# Altium PCB Motor Board.PcbDoc
Units mil, origin at the board's own origin, x right, y up, seen from the top; angles counter-clockwise.
Board outline 2020.01 x 1519 mil, 4 copper layers (Top Layer, GND, V_BATT, Bottom Layer); 38 components, 25 nets, 114 pads, 44 vias.
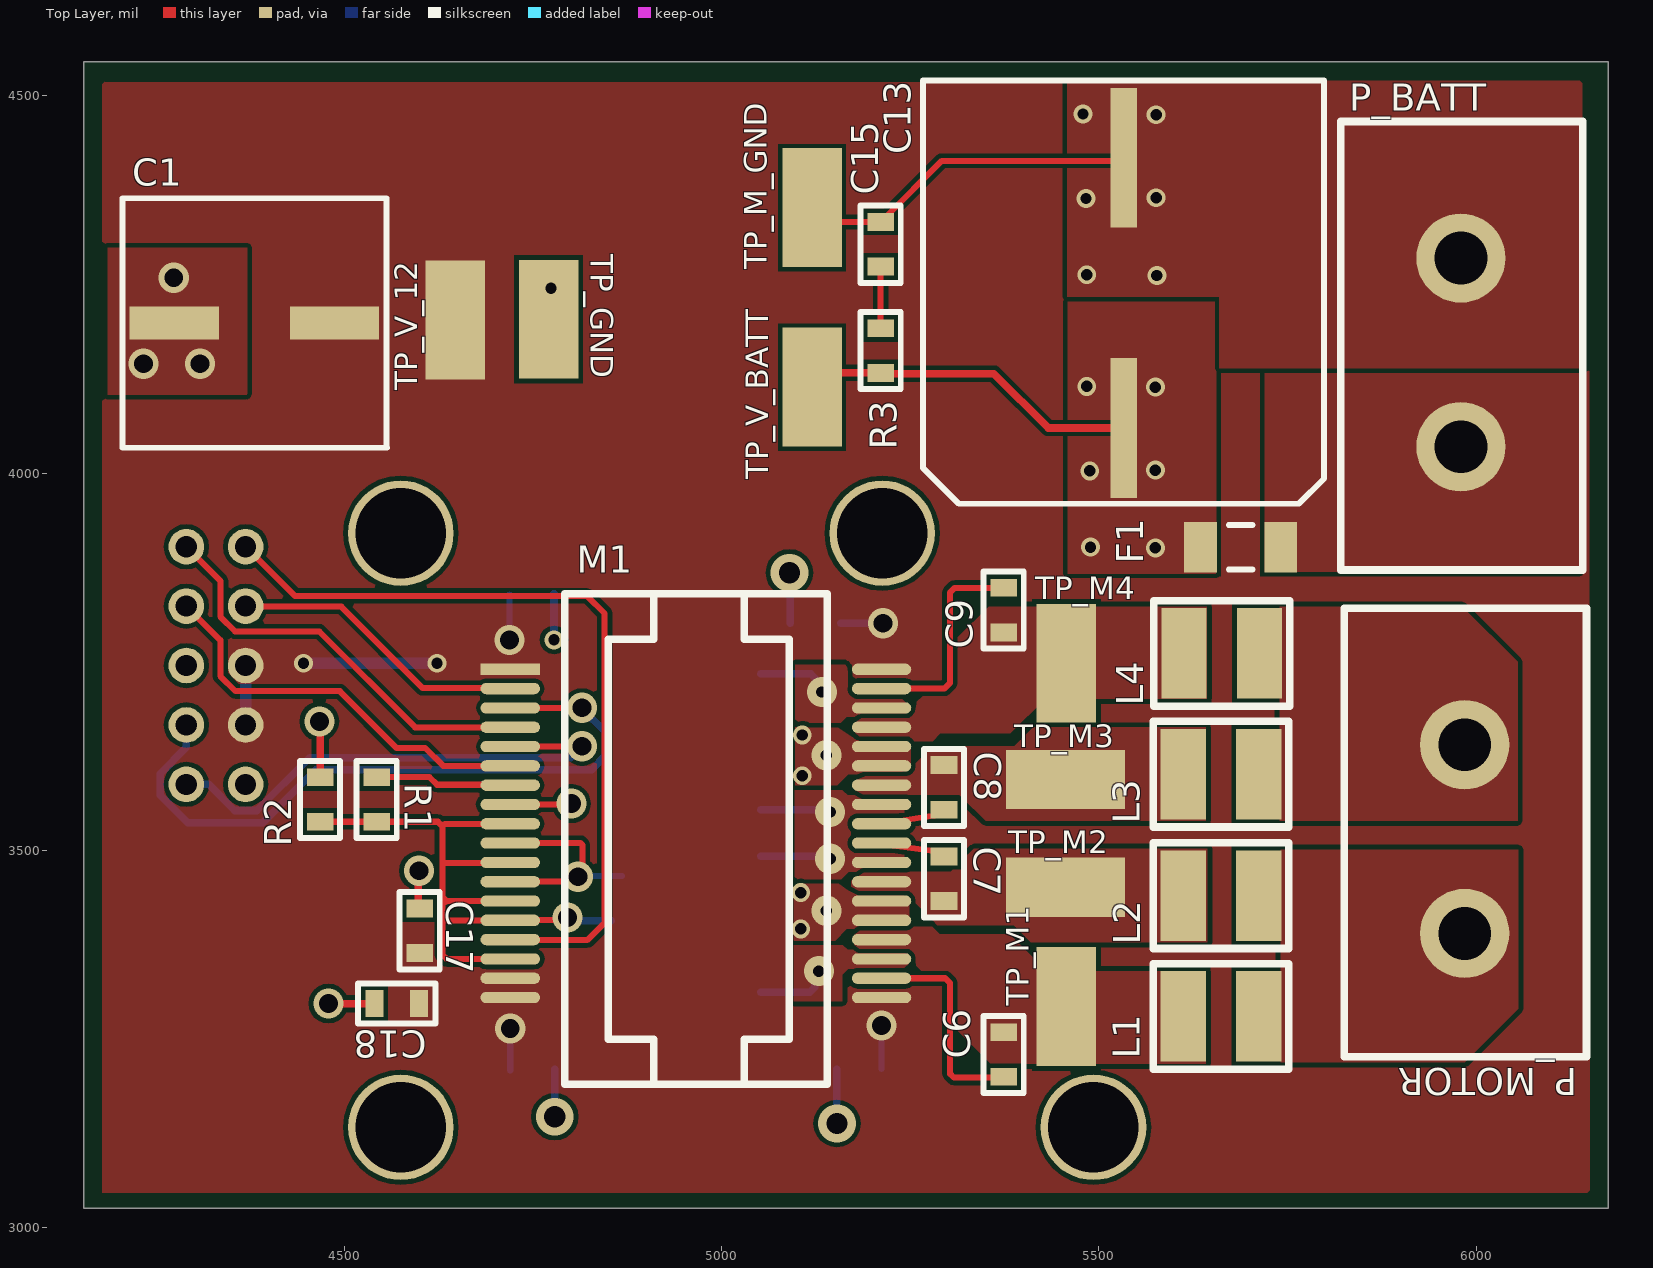
[diagram p0: Top Layer view]
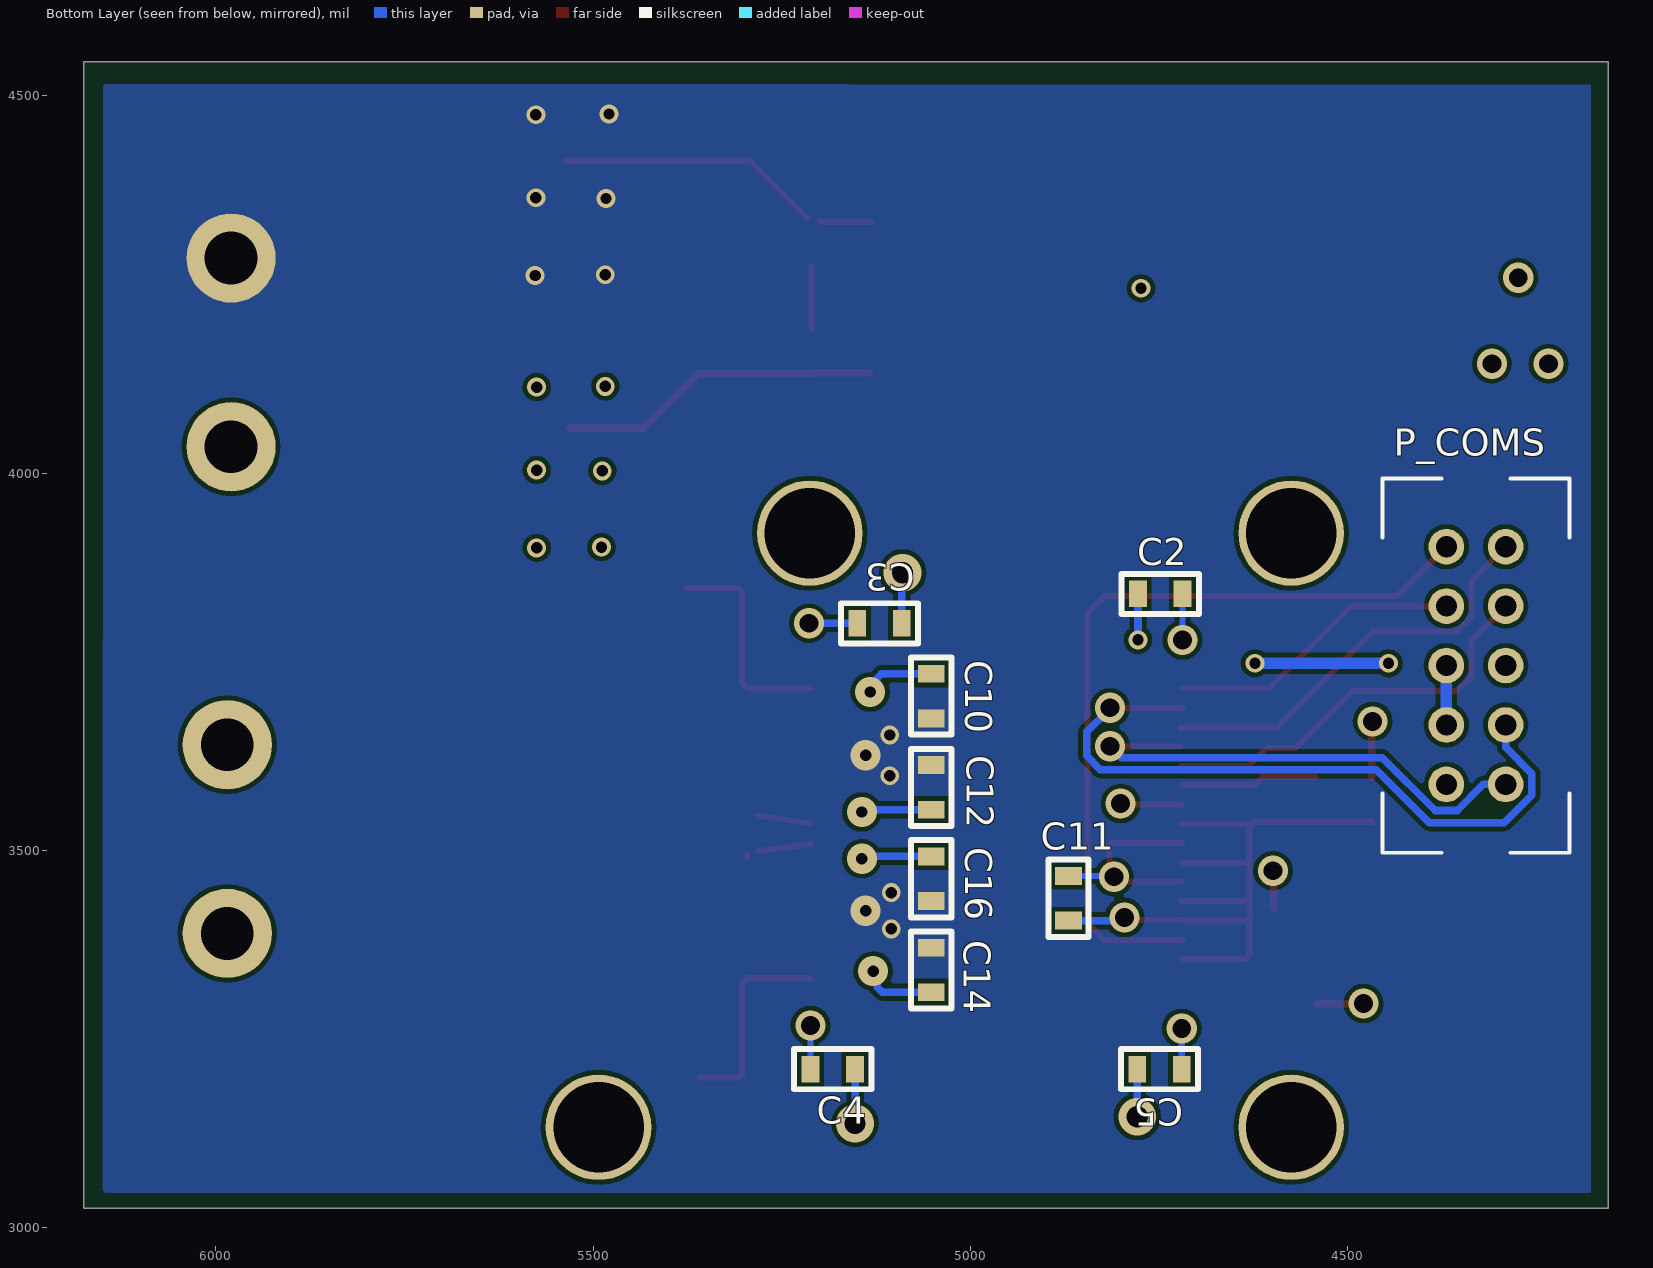
[diagram p1: Bottom Layer view, seen from below]
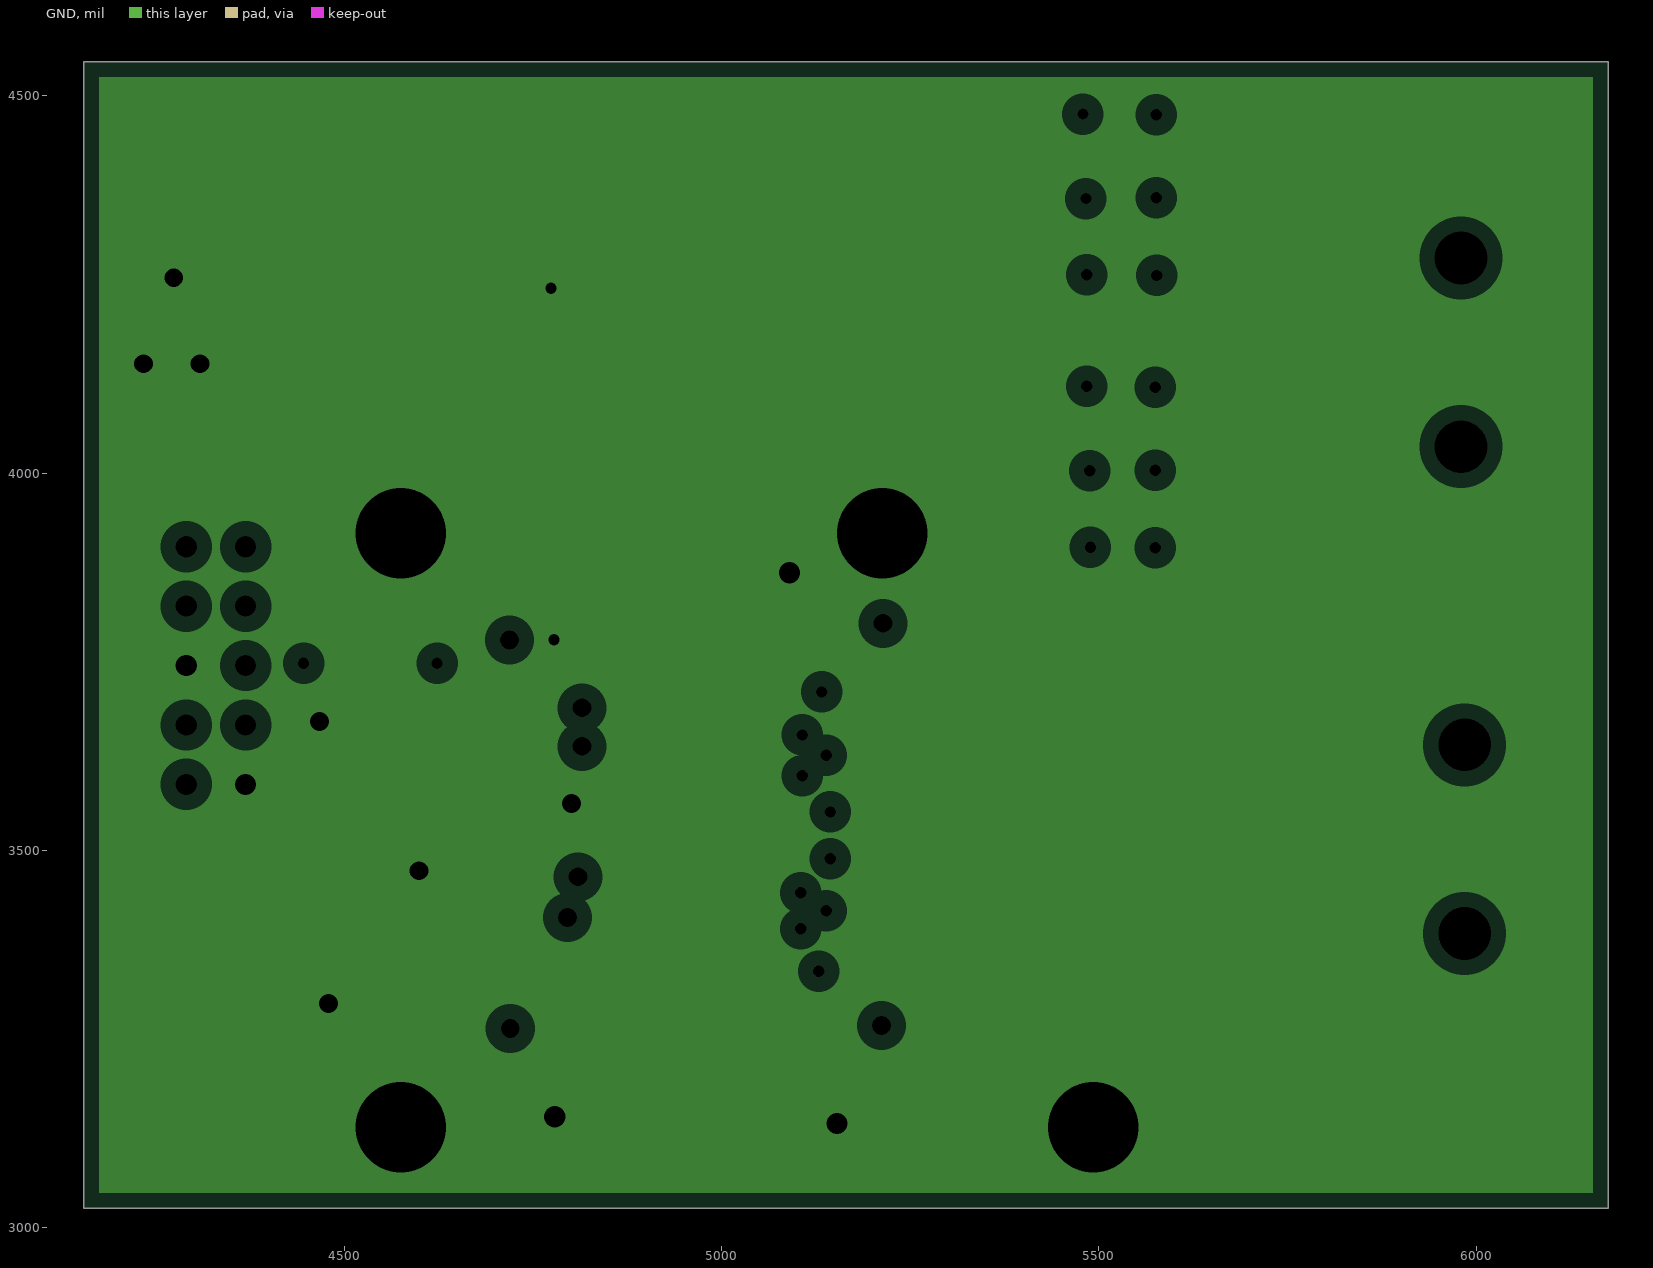
[diagram p2: GND, clearances drawn from the general rule]
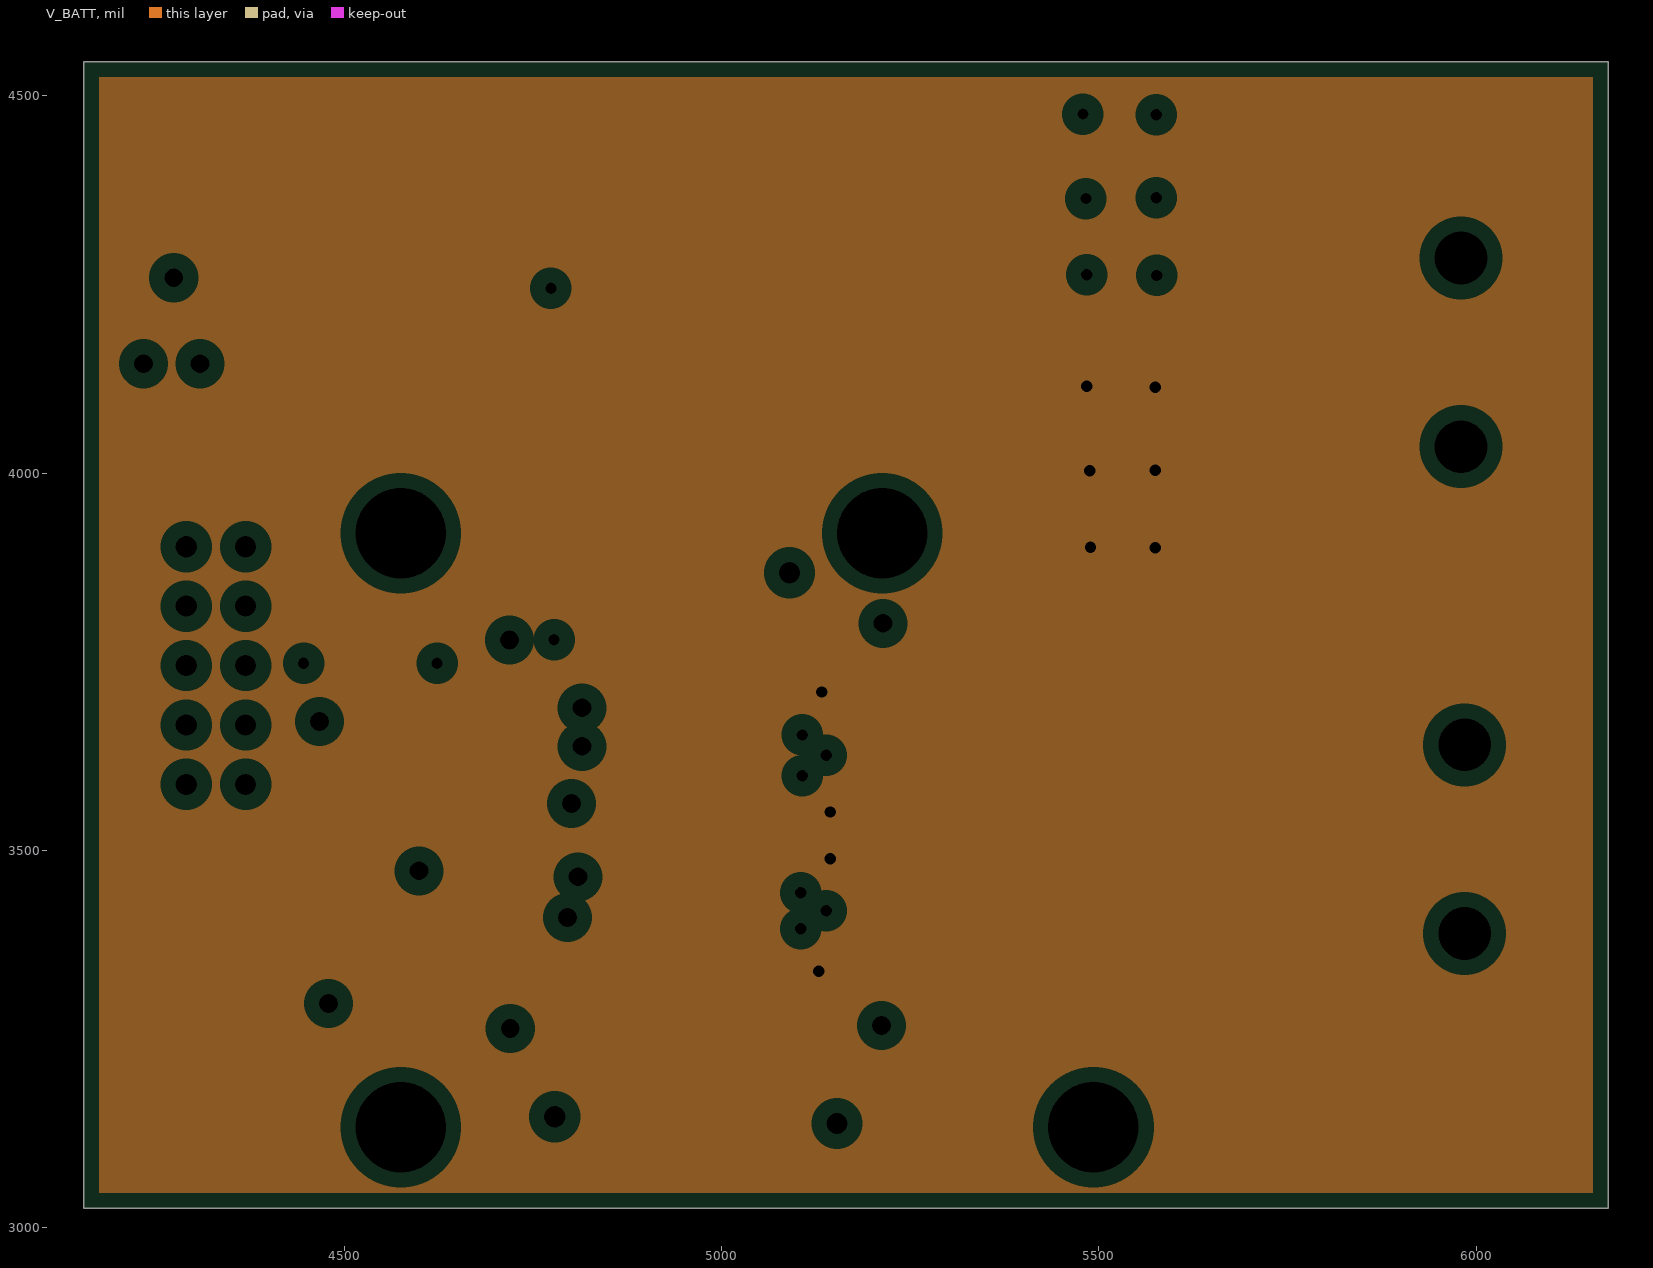
[diagram p3: V_BATT, clearances drawn from the general rule]

## Layer stack, top to bottom
Top Layer: signal copper 1.4
Dielectric: core 12.6, FR-4, Dk 4.8
GND: plane copper 1.4, net GND
Dielectric: prepreg 12.6, FR-4, Dk 4.8
V_BATT: plane copper 1.4, net V_BATT
Dielectric: core 12.6, FR-4, Dk 4.8
Bottom Layer: signal copper 1.4

## Board outline
4154.99,3026 6175,3026 6175,4545 4154.99,4545

## Design rules (kind name [scope] priority, off if disabled: settings)
Clearance Clearance_Polygon [InPolygon vs IsVia Or IsPad] p1 off: gap=23.62
Clearance Clearance_Inner [(OnLayer('Mid-Layer 1') OR OnLayer('Mid-Layer 2'))] p2: gap=10
Clearance [All] p3: gap=6
HoleSize [All] p1: absolutevalues=TRUE maxlimit=200 minlimit=15 maxpercent=80.000 minpercent=20.000
MinimumAnnularRing MinimumAnnularRing_Via [(IsVia)] p1: minimumring=5
MinimumAnnularRing MinimumAnnularRing_Hole [(InComponent('*'))] p2: minimumring=7
MinimumSolderMaskSliver [All] p1: minsoldermaskwidth=3.94
NetAntennae [All] p1 off: netantennaetolerance=0
PasteMaskExpansion [All] p1 off: expansion=0
PlaneClearance [All] p1: clearance=20
PlaneConnect [All] p1: planeconnectstyle=Relief reliefexpansion=20 reliefentries=4 reliefconductorwidth=10 reliefairgap=10
PolygonConnect [All] p1: connectstyle=Direct reliefconductorwidth=10 reliefentries=4 polygonreliefangle="90 Angle"
RoutingVias [All] p1: holewidth=15 width=25 viastyle="Through Hole" minholewidth=15 minwidth=25 maxholewidth=50 maxwidth=80
SMDNeckDown [All] p1: percent=60.000
SMDToCorner [All] p1: distance=393701
SilkToSilkClearance [All] p1 off: silktosilkclearance=5
SilkscreenOverComponentPads [All] p1 off: minsilkscreentomaskgap=5
SolderMaskExpansion [All] p1: expansion=2.5
Width [All] p1: maxlimit=200 minlimit=6 preferedwidth=8
20 further rules are at their usual default settings.

## Components (designator, comment, footprint, x,y, rotation, side; value= is the part's Value field where it differs from the comment)
C1 "330uF" "330uF Capacitor" 4381,4199 r0 top
C2 "1uF" 0603 4778,3840 r180 bottom
C3 "1uF" 0603 5091,3801 r0 bottom
C4 "1uF" 0603 5153,3210 r0 bottom
C5 "1uF" 0603 4779,3210 r180 bottom
C6 "100nF" 0603 5374,3259 r270 top
C7 "100nF" 0603 5295,3433 r90 top
C8 "100nF" 0603 5295,3613 r270 top
C9 "100nF" 0603 5374,3789 r90 top
C10 "100nF" 0603 5052,3675 r90 bottom
C11 "100nF" 0603 4870,3407 r90 bottom
C12 "100nF" 0603 5052,3613 r270 bottom
C13 "1000 uF" "Capacitor 1000uF" 5533,4239 r270 top
C14 "100nF" 0603 5052,3371 r270 bottom
C15 "10nF" 0603 5211,4333 r270 top
C16 "100nF" 0603 5052,3433 r90 bottom
C17 "1uF" 0603 4600,3364 r90 top
C18 "1uF" 0603 4599,3297 r180 top
F1 "12A fuse" RESC3216L 5688,3902 r0 top
L1 "FERRITE BEAD 10A" "10A Ferrite Bead - duplicate" 5662,3280 r0 top
L2 "FERRITE BEAD 10A" "10A Ferrite Bead - duplicate" 5662,3440 r0 top
L3 "FERRITE BEAD 10A" "10A Ferrite Bead - duplicate" 5662,3601 r0 top
L4 "FERRITE BEAD 10A" "10A Ferrite Bead - duplicate" 5663,3761 r0 top
M1 "DRV8432" DRV8432 4720,3740 r0 top
P_BATT "To Battery" 0010844020 5980,4035 r90 top (schematic designator P3)
P_COMS "79107-7004" 79107-7004 4330,3745 r90 bottom (schematic designator P1)
P_MOTOR "To Motor" 0010844020 5985,3390 r90 top (schematic designator P2)
R1 "22K" 0603 4543,3538 r90 top
R2 "1R0" 0603 4468,3538 r90 top
R3 "33R" 0603 5211,4192 r270 top
TP_GND "TP" TEST_POINT_4X2MM 4771,4204 r90 top
TP_M1 "TP" TEST_POINT_4X2MM 5457,3293 r270 top
TP_M2 "TP" TEST_POINT_4X2MM 5456,3451 r180 top
TP_M3 "TP" TEST_POINT_4X2MM 5456,3594 r180 top
TP_M4 "TP" TEST_POINT_4X2MM 5457,3748 r90 top
TP_M_GND "TP" TEST_POINT_4X2MM 5120,4352 r90 top
TP_V_12 "TP" TEST_POINT_4X2MM 4647,4203 r90 top
TP_V_BATT "TP" TEST_POINT_4X2MM 5120,4114 r90 top

## Footprints (in the part's own frame and the unit in brackets; to place one, negate y for a bottom-side part, rotate by r counter-clockwise, add the part's x,y. Pads: shape width x height; smd on the part's side, far side on the other; paste and mask are expansions set on the pad)
"10A Ferrite Bead - duplicate" [mil]
  rect 60x120 smd: 1(-50,0) 2(50,0)
  silkscreen extent -90,-70 90,70
"330uF Capacitor" [mm]
  rect 3x1.1 smd: 1(-2.7,0) 2(2.7,0)
  silkscreen extent -4.44,-4.2 4.45,4.2
0603 [mm] "Non polarized 0603 footprint"
  rect 0.6x0.9 smd: 1(0,0) 2(1.5,0)
  silkscreen extent -0.55,-0.67 2.05,0.67
79107-7004 [mm]
  round 1.2 hole 0.71: 1(4,-1) 2(2,-1) 3(0,-1) 4(-2,-1) 5(-4,-1) 6(-4,1) 7(-2,1) 8(0,1) 9(2,1) 10(4,1)
  silkscreen extent -6.3,-3.15 6.3,3.15, body extent -6.25,-3.1 6.2,3.1, height 6.4
0010844020 [mm]
  round 3 hole 1.778: 1(0,0) 2(6.35,0)
  silkscreen extent -4.15,-4.1 10.95,4.05
"Capacitor 1000uF" [mm]
  rect 4.7x0.9 smd: 1(-4.55,0) 2(4.55,0)
  silkscreen extent -7.15,-6.75 7.1,6.75
DRV8432 [mm]
  rect 2x0.38 smd: 1(0,0)
  oval 2x0.38 smd: 2(0,-0.65) 3(0,-1.3) 4(0,-1.95) 5(0,-2.6) 6(0,-3.25) 7(0,-3.9) 8(0,-4.55) 9(0,-5.2) 10(0,-5.85) 11(0,-6.5) 12(0,-7.15) 13(0,-7.8) 14(0,-8.45) 15(0,-9.1) 16(0,-9.75) 17(0,-10.4) 18(0,-11.05) 19(12.5,-11.05) 20(12.5,-10.4) 21(12.5,-9.75) 22(12.5,-9.1) 23(12.5,-8.45) 24(12.5,-7.8) 25(12.5,-7.15) 26(12.5,-6.5) 27(12.5,-5.85) 28(12.5,-5.2) 29(12.5,-4.55) 30(12.5,-3.9) 31(12.5,-3.25) 32(12.5,-2.6) 33(12.5,-1.95) 34(12.5,-1.3) 35(12.5,-0.65) 36(12.5,0)
  silkscreen extent 1.84,-13.97 10.67,2.54
RESC3216L [mm] "Chip Resistor, Body 3.1x1.6mm, IPC High Density"
  rect 1.1x1.7 smd: 1(-1.35,0) 2(1.35,0)
  silkscreen extent -0.4,-0.75 0.4,0.75, body extent -1.68,-0.87 1.68,0.87, height 2.54
TEST_POINT_4X2MM [mm] "Test Point Pad"
  rect 4x2 smd: 1(0,0)

## Part data
C1: library part AVE337M16F24T-F
C2 C3 C4 C5 C17 C18: library part CP_1uF_50V_0603, "CAP CER 1.0UF 50V X7R 0603"
C6 C7 C8 C9 C10 C11 C12 C14 C16: library part "CP_100nF 0603", "CAP CER .10UF 50V X5R 0603"
C13: library part EEUFK1V102L
C15: library part "CP_10nF 0603", "CAP CER 10000PF 100V X7R 0603"
F1: library part "Fuse 1", "Fuse"
L1 L2 L3 L4: library part "10A Ferrite bead", "FERRITE 10A 56 OHM 1612 SMD"
M1: "Motor Driver"
P_BATT P_MOTOR: library part "Power Header"
P_COMS: "CONN RECEPT 2MM 10POS VERT"
R1: library part "RS_22k 0603", "RES 22.0K OHM 1/10W 1% 0603 SMD"
R2: library part "RS_1R0 0603", "RES 1R0 OHM 1/10W 1% 0603 SMD"
R3: library part "RS_33R 0603", "RES 33 OHM 1/10W 1% 0603 SMD"
TP_GND TP_M1 TP_M2 TP_M3 TP_M4 TP_M_GND TP_V_12 TP_V_BATT: library part TP_TESTPOINT, "Test-Point"

## Free pads (board coordinates)
  round 140 hole 120: 2(4575,3133) 2(4575,3920.4) 2(5493,3133) 3(5213,3920.4)

## Via types
v1: diameter 25, hole 15, Top Layer to Bottom Layer, 20 vias
v2: diameter 40, hole 25, Top Layer to Bottom Layer, 15 vias
v3: diameter 40, hole 15, Top Layer to Bottom Layer, 6 vias
v4: diameter 50, hole 28, Top Layer to Bottom Layer, 3 vias

## Nets (pads, with @x,y where several pads share a name; then routed paths per layer and width w, separated by ;. In a path a pad name is that pad's centre, name@x,y a point inside that pad or via, vN(x,y) a via of type N, cw(c..) or ccw(c..) an arc to the next point about the centre after c; other vN are vias at no path point)
FAULT: M1.3 P_COMS.4 | length 930.2
  Top Layer w8: M1.3@4719,3689 v2(4815,3689)
  Bottom Layer w10: P_COMS.4@4300.13,3666.26 P_COMS.4 4290.63,3636.48 4256.01,3601.86 4256.01,3573.18 4292.29,3536.9 4391.9,3536.9 4462,3607 4827.84,3607 4846,3625.16 4846,3657 v2@4815,3688
GND: C1.1 C2.1 C3.1 C4.1 C5.1 C17.2 C18.2 M1.8 P_COMS.3 P_COMS.6 pad.2 pad.3 R2.2 TP_GND.1 | length 517.7
  Top Layer w8: M1.8 v2@4799.87,3560.87
  Top Layer w10: R2.2 v2@4468,3667 ; v2@4484,3297 C18.2@4540.94,3297 ; C17.2@4598,3423.06 v2@4598,3472
  Bottom Layer w10: v1(4778,3779) C2.1 ; v4(4779,3147) C5.1 ; C3.1 v4@5091,3867 ; v4(5153,3138) C4.1
  other v1: 4774,4245
  other v2: 4479,3297 4599,3473 4801,3562 4467,3671 4234,4145 4309,4145 4274,4259
  other v4: 5090,3868
M_GND: C10.1 C12.1 C13.1 C14.1 C15.1 C16.1 M1.23 M1.24 M1.31 M1.32 P_BATT.2 TP_M_GND.1 | length 419.5
  Top Layer w8: TP_M_GND.1@5131,4333 C15.1@5199,4333 ; C15.1@5216,4338 5292,4414 C13.1@5536,4414
  other v1: 5105,3396 5105,3444 5107,3599 5107,3653 5577,4262 5484,4263 5483,4364 5576,4365 5576,4475 5479,4476
  other v3: 5139,3420 5139,3626
NetC6_1: C6.1 L1.1 M1.22 TP_M1.1
NetC6_2: C6.2 M1.20 | length 272.7
  Top Layer w8: M1.20 5296.45,3330.55 5303,3324 5303,3204 5308,3199 C6.2@5360,3199
NetC7_1: C7.1 L2.1 M1.25 TP_M2.1
NetC7_2: C7.2 M1.27 | length 74.6
  Top Layer w8: M1.27@5212.13,3508.68 C7.2@5281,3499 ; C7.2@5296,3491 C7.2@5296,3496
NetC8_1: C8.1 L3.1 M1.30 TP_M3.1
NetC8_2: C8.2 M1.28 | length 69.7
  Top Layer w8: M1.28@5213.13,3535.32 C8.2@5282,3546
NetC9_1: C9.1 L4.1 M1.33 TP_M4.1
NetC9_2: C9.2 M1.35 | length 290.5
  Top Layer w8: M1.35 5295.41,3714.41 5303,3722 5303,3842 5309,3848 C9.2@5377,3848
NetC11_1: C11.1 M1.9 M1.11 M1.13 M1.14 M1.16 R1.1 R2.1 | length 919.3
  Top Layer w8: R2.1 R1.1 4624,3538 4630,3532 ; 4630,3489 4630,3410 4630,3362 4635.86,3356.14 M1.16 ; 4630,3490 4630,3532 ; 4631,3483 M1.11@4720,3483 ; 4632.68,3407.32 M1.14 ; 4634.09,3432.91 M1.13 ; M1.9 4633.28,3535.28 4630,3532 ; M1.14@4721,3408 v2@4793,3408
  Top Layer w10: 4630,3410 4632.68,3407.32 ; 4631,3436 4634.09,3432.91
  Bottom Layer w10: v2(4796,3411) 4800,3407 C11.1@4854,3407
NetC11_2: C11.2 M1.10 M1.12 | length 278.2
  Top Layer w8: M1.12 4803.5,3458.5 v2(4810,3465) ; M1.10 4813.32,3509.68 4816,3507 4816,3477 v2@4815,3476
  Bottom Layer w8: v2@4811,3466 C11.2@4868,3466
NetC15_2: C15.2 R3.1 | length 82
  Top Layer w8: R3.1 C15.2 C15.2@5211,4274
NetF1_2: F1.2 P_BATT.1
NetL1_2: L1.2 L2.2 P_MOTOR.1
NetL3_2: L3.2 L4.2 P_MOTOR.2
NetM1_7: M1.7 R1.2 | length 180.2
  Top Layer w8: R1.2 4612.94,3597.06 4623,3587 M1.7@4719,3587
OTW: M1.2 P_COMS.9 | length 393.7
  Top Layer w8: P_COMS.9 4370.11,3823 4496,3823 4604,3715 M1.2@4718,3715
PWM_A: M1.4 P_COMS.1 | length 558.4
  Top Layer w8: P_COMS.1 4335.75,3857.36 4335.75,3809.81 4355.44,3790.12 4466.88,3790.12 4594,3663 M1.4@4722,3663
PWM_B: M1.6 P_COMS.2 | length 544.9
  Top Layer w8: P_COMS.2 4335.75,3778.62 4335.75,3731.07 4355.82,3711 4494,3711 4569,3636 4607,3636 4631,3612 M1.6
RESET_AB: M1.5 P_COMS.5 | length 676.1
  Top Layer w8: M1.5@4722,3638 v2(4815,3638)
  Bottom Layer w8: v2@4809.64,3632.64 v2@4814,3637 ; v2(4815,3638) v2@4814,3637 ; v2@4817,3637 v2@4814,3637
  Bottom Layer w10: P_COMS.5 4320.41,3587.52 4355.03,3552.9 4383.9,3552.9 4454,3623 4800,3623 v2@4814,3637
RESET_CD: M1.15 P_COMS.10 | length 1057.8
  Top Layer w8: P_COMS.10 4434.85,3837 4778,3837 4822,3837 4845,3814 4845,3404 4822,3381 M1.15@4719,3381
V_12: C1.2 C2.2 C3.2 C4.2 C5.2 C17.1 C18.1 M1.1 M1.17 M1.18 M1.19 M1.36 P_COMS.7 P_COMS.8 TP_V_12.1 | length 487.2
  Bottom Layer w8: P_COMS.7@4369,3665 4369.37,3665.37 P_COMS.7 ; v2(4719,3779) C2.2@4719,3839 ; C5.2@4720,3208 v2(4720,3264) ; C4.2@5212,3210 v2(5212,3268)
  Bottom Layer w10: C3.2@5158,3801 v2(5214,3801)
  Bottom Layer w15: P_COMS.7 P_COMS.8 ; v1(4446,3748) v1(4623,3748)
V_BATT: C10.2 C12.2 C13.2 C14.2 C16.2 F1.1 M1.21 M1.26 M1.29 M1.34 R3.2 TP_V_BATT.1 | length 781.3
  Top Layer w10: TP_V_BATT.1@5134.06,4132.94 R3.2 ; R3.2@5215,4132 5361,4132 5433.13,4059.87 C13.2@5531,4059.87
  Bottom Layer w10: C14.2 5116.94,3311.94 5123.5,3318.5 v3@5123.5,3328.5 ; C16.2@5052,3492 5138,3492 v3@5143,3497 ; C12.2@5052,3554 5137,3554 v3@5143,3548 ; C10.2 5117.94,3734.06 5127,3725 v3@5127,3716
  other v1: 5575,3901 5489,3902 5488,4003 5575,4004 5575,4114 5484,4115
  other v3: 5129,3340 5144,3489 5144,3551 5133,3710

## Polygon pours and split planes (outlines as drawn)
M_GND on Bottom Layer "Signal Layer 1-No Net" (solid, pour order 1015): 6149.38,4516 4178,4515.02 4178,3046 6150,3046
GND on Top Layer "Signal Layer 1-No Net" (solid, pour order 1002): 4371.5,4299 4371.5,4105.47 4370.5,4104 4186.5,4104 4186.5,4299
NetL1_2 on Top Layer "Top Layer-No Net" (solid, pour order 1014): 5741,3501 5741,3219 5985,3219 6056,3290 6056,3501
NetF1_2 on Top Layer "Top Layer-No Net" (solid, pour order 1013): 6137,4134 6136,4133 5720,4133 5720,3869 6137,3869
NetL3_2 on Top Layer "Top Layer-No Net" (solid, pour order 1012): 5740,3539 5740,3823 5982,3823 6055,3750 6055,3539
M_GND on Top Layer "Signal Layer 1-No Net" (solid, pour order 1011): 5173,3650 5240,3649 5246,3642 5251,3638 5251,3610 5246,3605 5240,3605 5235,3600 5234,3601 5168,3601 5152,3585 5099,3585 5098,3586 5098,3663 5154,3663
M_GND on Top Layer "Signal Layer 1-No Net" (solid, pour order 1010): 5171,3445 5238,3444 5244,3437 5249,3433 5249,3405 5244,3400 5238,3400 5233,3395 5232,3396 5166,3396 5150,3380 5097,3380 5096,3381 5096,3458 5152,3458
V_BATT on Top Layer "Signal Layer 1-No Net" (solid, pour order 1009): 5242,3564 5242,3475 5243,3474 5243,3472 5169,3472 5168,3471 5159,3462 5153,3462 5097,3462 5096,3461 5097,3462 5097,3580 5160,3580 5167,3573 5168,3573 5238,3573 5243,3568 5243,3564
NetC7_1 on Top Layer "Signal Layer 1-No Net" (solid, pour order 1006): 5190.86,3472 5172,3460 5172,3452 5187,3444 5243.03,3444 5285.89,3401 5387,3401 5410,3378 5644,3378 5644,3502 5334,3502 5304,3472
V_12 on Top Layer "Signal Layer 1-No Net" (solid, pour order 1016): 6150,4518.02 6151,3046 4179,3046 4179,4519
M_GND on Top Layer "Signal Layer 1-No Net" (solid, pour order 1000): 6140,4139 5660,4139 5660,4234 5458,4234 5458,4520 6141,4520
V_BATT on Top Layer "Signal Layer 1-No Net" (solid, pour order 1001): 5656,3867.81 5655,3867 5459,3867 5459,4232 5656,4232
NetC6_1 on Top Layer "Signal Layer 1-No Net" (solid, pour order 1005): 5190,3399 5176,3388 5176,3375 5189,3365 5236,3365 5257,3355 5258,3347 5279,3328 5301,3328 5302.86,3271.14 5357,3217 5642,3217 5642,3340 5431,3340 5382,3389 5289,3389 5279,3399
NetC9_1 on Top Layer "Signal Layer 1-No Net" (solid, pour order 1005): 5191,3645 5177,3656 5177,3669 5190,3679 5237,3679 5258,3689 5259,3697 5280,3716 5302,3716 5303.86,3772.86 5354,3823 5643,3823 5643,3701 5429,3701 5383,3655 5290,3655 5280,3645
NetC8_1 on Top Layer "Signal Layer 1-No Net" (solid, pour order 1004): 5188,3574 5177,3580 5177,3593 5190.75,3598 5240,3598 5279.87,3638 5388,3638 5413,3663 5642,3663 5642,3539 5350,3539 5315,3574
V_BATT on Top Layer "Signal Layer 1-No Net" (solid, pour order 1008): 5241,3343 5168,3343 5161,3336 5160,3336 5160,3300 5096,3300 5096,3374 5161,3374 5167,3368 5241,3368 5248,3362 5248,3350
V_BATT on Top Layer "Signal Layer 1-No Net" (solid, pour order 1007): 5244,3680 5241,3677 5166,3677 5158,3669 5098,3669 5098,3746 5167,3746 5167,3717 5182,3702 5238,3702 5244,3696
GND on GND (split plane): 6154.9,3046.1 4175.09,3046.1 4175.09,4524.9 6154.9,4524.9
V_BATT on V_BATT (split plane): 6154.9,3046.1 4175.09,3046.1 4175.09,4524.9 6154.9,4524.9